# EAGLE board foo (EAGLE 4.11)
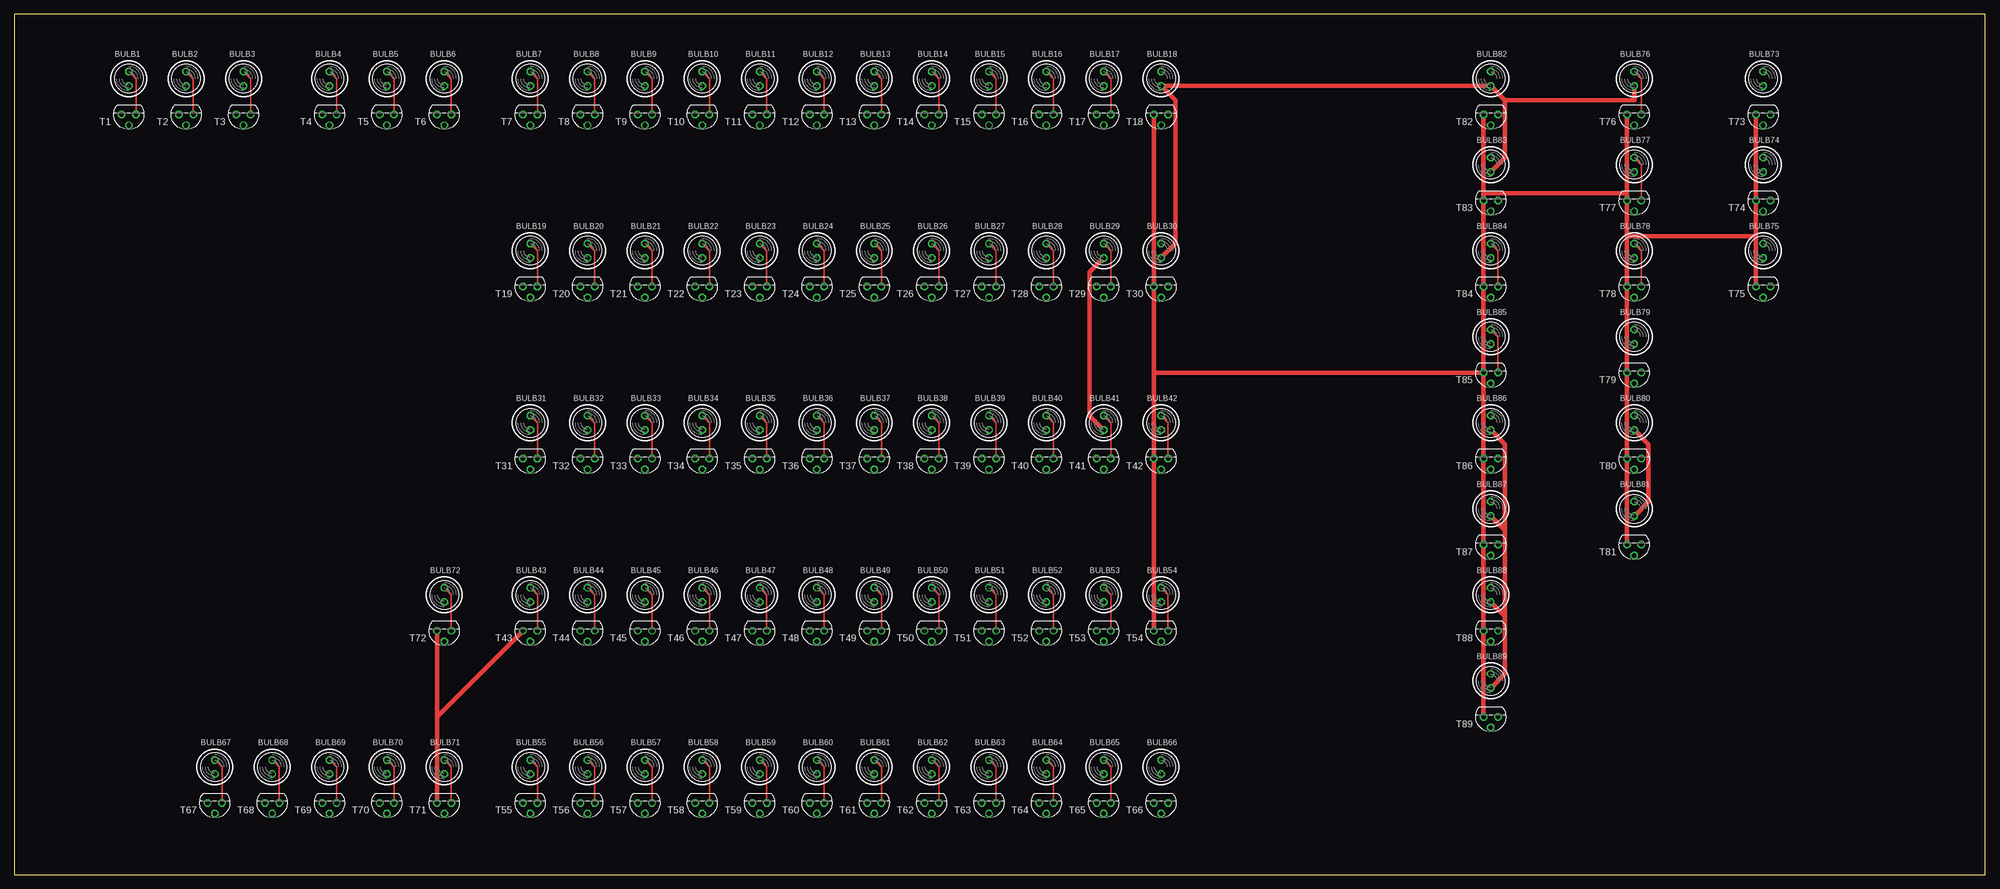
[diagram p0: board, top side]
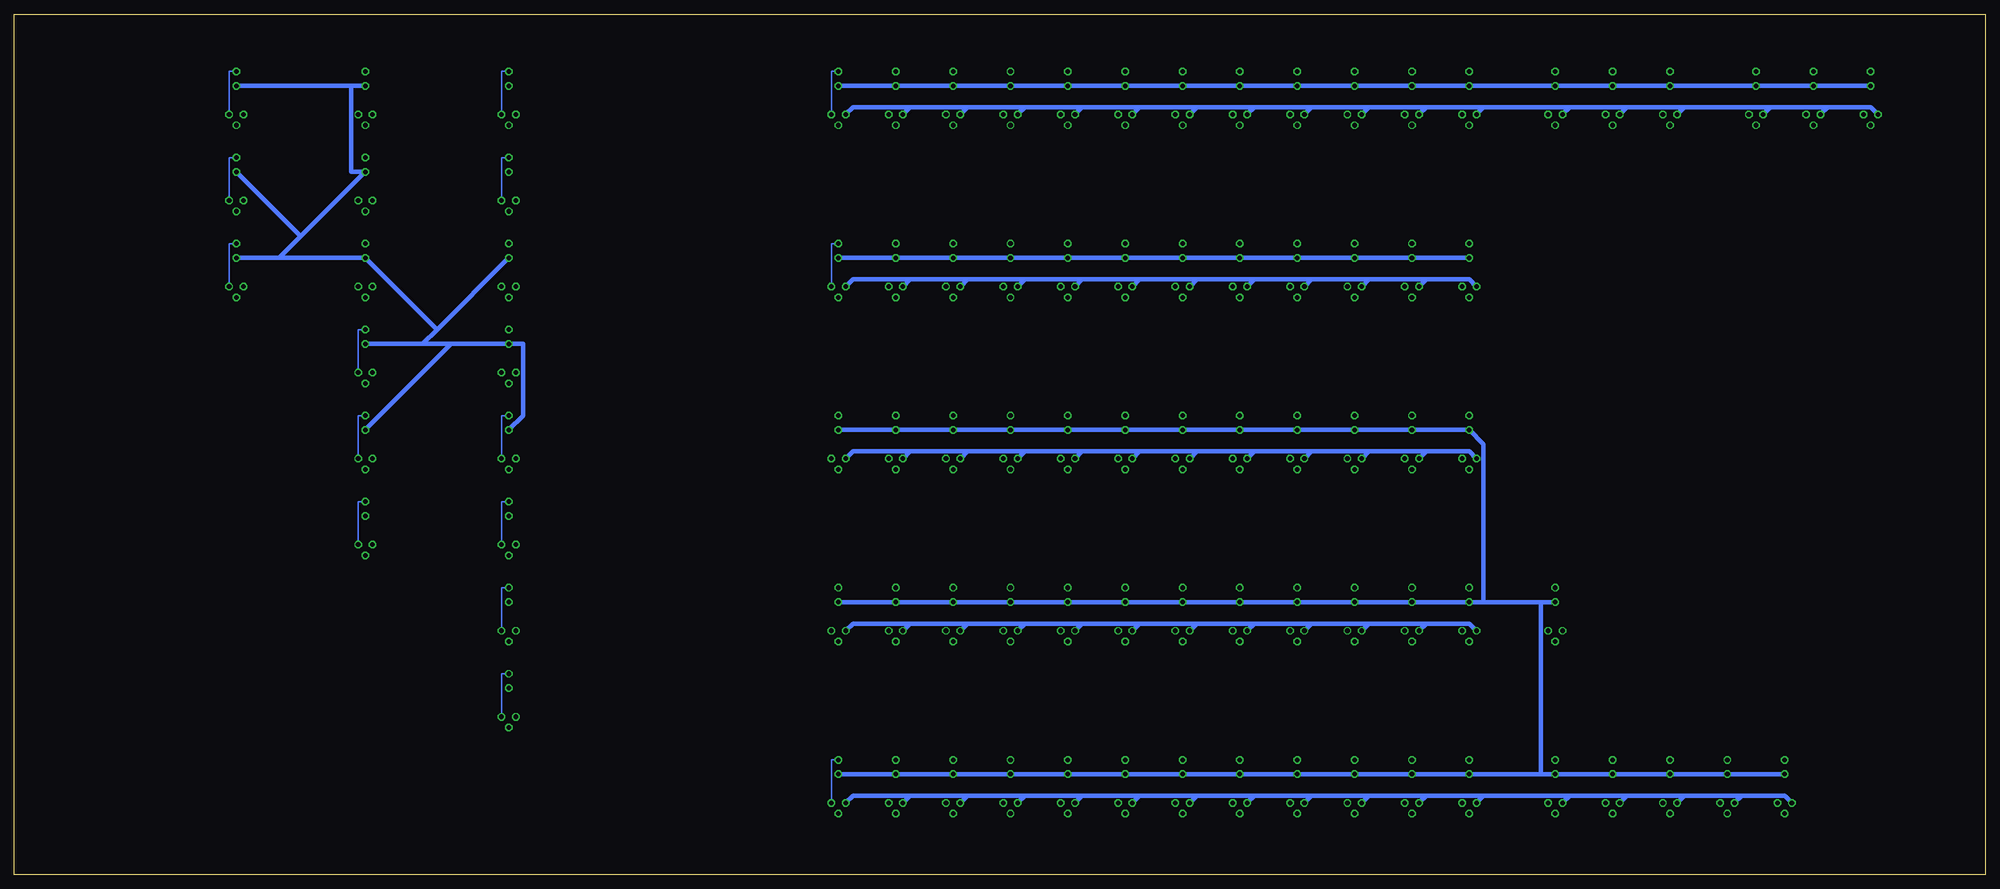
[diagram p1: board, bottom side, seen from below]

Size 349.25 x 152.4 mm. Coordinates in mm from the lower left corner, seen from the top.
Outline: 0,0 349.25,0 349.25,152.4 0,152.4 0,0
Copper layers (1*16): Top 0.035mm / dielectric 1.5mm / Bottom 0.035mm
Design rules "default": minimum track width 10mil, minimum drill 24mil, track to track 8mil, track to pad 8mil, pad to pad 8mil, via to via 8mil, smd to smd 8mil, copper to edge 40mil, drill to drill 8mil, minimum pad ring 10mil, minimum via ring 8mil, stop-mask expansion 4mil, vias tented up to drill 0mil, thermal gap 10mil
Net classes: 1 supply: width 0.762 mm

## Footprints (pad centres in the part's own frame; a part is rotated, then mirrored left to right if it is on the bottom)
BULB = drill 0.813 octagon: A 0,0; B 0,2.54
TO92 = drill 0.813 octagon: 1 1.27,0; 2 0,1.905; 3 -1.27,0

## Placement (x,y rotation side)
BULB1  [BULB]  20.32,139.7 0 top
BULB2  [BULB]  30.48,139.7 0 top
BULB3  [BULB]  40.64,139.7 0 top
BULB4  [BULB]  55.88,139.7 0 top
BULB5  [BULB]  66.04,139.7 0 top
BULB6  [BULB]  76.2,139.7 0 top
BULB7  [BULB]  91.44,139.7 0 top
BULB8  [BULB]  101.6,139.7 0 top
BULB9  [BULB]  111.76,139.7 0 top
BULB10  [BULB]  121.92,139.7 0 top
BULB11  [BULB]  132.08,139.7 0 top
BULB12  [BULB]  142.24,139.7 0 top
BULB13  [BULB]  152.4,139.7 0 top
BULB14  [BULB]  162.56,139.7 0 top
BULB15  [BULB]  172.72,139.7 0 top
BULB16  [BULB]  182.88,139.7 0 top
BULB17  [BULB]  193.04,139.7 0 top
BULB18  [BULB]  203.2,139.7 0 top
BULB19  [BULB]  91.44,109.22 0 top
BULB20  [BULB]  101.6,109.22 0 top
BULB21  [BULB]  111.76,109.22 0 top
BULB22  [BULB]  121.92,109.22 0 top
BULB23  [BULB]  132.08,109.22 0 top
BULB24  [BULB]  142.24,109.22 0 top
BULB25  [BULB]  152.4,109.22 0 top
BULB26  [BULB]  162.56,109.22 0 top
BULB27  [BULB]  172.72,109.22 0 top
BULB28  [BULB]  182.88,109.22 0 top
BULB29  [BULB]  193.04,109.22 0 top
BULB30  [BULB]  203.2,109.22 0 top
BULB31  [BULB]  91.44,78.74 0 top
BULB32  [BULB]  101.6,78.74 0 top
BULB33  [BULB]  111.76,78.74 0 top
BULB34  [BULB]  121.92,78.74 0 top
BULB35  [BULB]  132.08,78.74 0 top
BULB36  [BULB]  142.24,78.74 0 top
BULB37  [BULB]  152.4,78.74 0 top
BULB38  [BULB]  162.56,78.74 0 top
BULB39  [BULB]  172.72,78.74 0 top
BULB40  [BULB]  182.88,78.74 0 top
BULB41  [BULB]  193.04,78.74 0 top
BULB42  [BULB]  203.2,78.74 0 top
BULB43  [BULB]  91.44,48.26 0 top
BULB44  [BULB]  101.6,48.26 0 top
BULB45  [BULB]  111.76,48.26 0 top
BULB46  [BULB]  121.92,48.26 0 top
BULB47  [BULB]  132.08,48.26 0 top
BULB48  [BULB]  142.24,48.26 0 top
BULB49  [BULB]  152.4,48.26 0 top
BULB50  [BULB]  162.56,48.26 0 top
BULB51  [BULB]  172.72,48.26 0 top
BULB52  [BULB]  182.88,48.26 0 top
BULB53  [BULB]  193.04,48.26 0 top
BULB54  [BULB]  203.2,48.26 0 top
BULB55  [BULB]  91.44,17.78 0 top
BULB56  [BULB]  101.6,17.78 0 top
BULB57  [BULB]  111.76,17.78 0 top
BULB58  [BULB]  121.92,17.78 0 top
BULB59  [BULB]  132.08,17.78 0 top
BULB60  [BULB]  142.24,17.78 0 top
BULB61  [BULB]  152.4,17.78 0 top
BULB62  [BULB]  162.56,17.78 0 top
BULB63  [BULB]  172.72,17.78 0 top
BULB64  [BULB]  182.88,17.78 0 top
BULB65  [BULB]  193.04,17.78 0 top
BULB66  [BULB]  203.2,17.78 0 top
BULB67  [BULB]  35.56,17.78 0 top
BULB68  [BULB]  45.72,17.78 0 top
BULB69  [BULB]  55.88,17.78 0 top
BULB70  [BULB]  66.04,17.78 0 top
BULB71  [BULB]  76.2,17.78 0 top
BULB72  [BULB]  76.2,48.26 0 top
BULB73  [BULB]  309.88,139.7 0 top
BULB74  [BULB]  309.88,124.46 0 top
BULB75  [BULB]  309.88,109.22 0 top
BULB76  [BULB]  287.02,139.7 0 top
BULB77  [BULB]  287.02,124.46 0 top
BULB78  [BULB]  287.02,109.22 0 top
BULB79  [BULB]  287.02,93.98 0 top
BULB80  [BULB]  287.02,78.74 0 top
BULB81  [BULB]  287.02,63.5 0 top
BULB82  [BULB]  261.62,139.7 0 top
BULB83  [BULB]  261.62,124.46 0 top
BULB84  [BULB]  261.62,109.22 0 top
BULB85  [BULB]  261.62,93.98 0 top
BULB86  [BULB]  261.62,78.74 0 top
BULB87  [BULB]  261.62,63.5 0 top
BULB88  [BULB]  261.62,48.26 0 top
BULB89  [BULB]  261.62,33.02 0 top
T1  2N2222  [TO92]  20.32,134.62 180 top
T2  2N2222  [TO92]  30.48,134.62 180 top
T3  2N2222  [TO92]  40.64,134.62 180 top
T4  2N2222  [TO92]  55.88,134.62 180 top
T5  2N2222  [TO92]  66.04,134.62 180 top
T6  2N2222  [TO92]  76.2,134.62 180 top
T7  2N2222  [TO92]  91.44,134.62 180 top
T8  2N2222  [TO92]  101.6,134.62 180 top
T9  2N2222  [TO92]  111.76,134.62 180 top
T10  2N2222  [TO92]  121.92,134.62 180 top
T11  2N2222  [TO92]  132.08,134.62 180 top
T12  2N2222  [TO92]  142.24,134.62 180 top
T13  2N2222  [TO92]  152.4,134.62 180 top
T14  2N2222  [TO92]  162.56,134.62 180 top
T15  2N2222  [TO92]  172.72,134.62 180 top
T16  2N2222  [TO92]  182.88,134.62 180 top
T17  2N2222  [TO92]  193.04,134.62 180 top
T18  2N2222  [TO92]  203.2,134.62 180 top
T19  2N2222  [TO92]  91.44,104.14 180 top
T20  2N2222  [TO92]  101.6,104.14 180 top
T21  2N2222  [TO92]  111.76,104.14 180 top
T22  2N2222  [TO92]  121.92,104.14 180 top
T23  2N2222  [TO92]  132.08,104.14 180 top
T24  2N2222  [TO92]  142.24,104.14 180 top
T25  2N2222  [TO92]  152.4,104.14 180 top
T26  2N2222  [TO92]  162.56,104.14 180 top
T27  2N2222  [TO92]  172.72,104.14 180 top
T28  2N2222  [TO92]  182.88,104.14 180 top
T29  2N2222  [TO92]  193.04,104.14 180 top
T30  2N2222  [TO92]  203.2,104.14 180 top
T31  2N2222  [TO92]  91.44,73.66 180 top
T32  2N2222  [TO92]  101.6,73.66 180 top
T33  2N2222  [TO92]  111.76,73.66 180 top
T34  2N2222  [TO92]  121.92,73.66 180 top
T35  2N2222  [TO92]  132.08,73.66 180 top
T36  2N2222  [TO92]  142.24,73.66 180 top
T37  2N2222  [TO92]  152.4,73.66 180 top
T38  2N2222  [TO92]  162.56,73.66 180 top
T39  2N2222  [TO92]  172.72,73.66 180 top
T40  2N2222  [TO92]  182.88,73.66 180 top
T41  2N2222  [TO92]  193.04,73.66 180 top
T42  2N2222  [TO92]  203.2,73.66 180 top
T43  2N2222  [TO92]  91.44,43.18 180 top
T44  2N2222  [TO92]  101.6,43.18 180 top
T45  2N2222  [TO92]  111.76,43.18 180 top
T46  2N2222  [TO92]  121.92,43.18 180 top
T47  2N2222  [TO92]  132.08,43.18 180 top
T48  2N2222  [TO92]  142.24,43.18 180 top
T49  2N2222  [TO92]  152.4,43.18 180 top
T50  2N2222  [TO92]  162.56,43.18 180 top
T51  2N2222  [TO92]  172.72,43.18 180 top
T52  2N2222  [TO92]  182.88,43.18 180 top
T53  2N2222  [TO92]  193.04,43.18 180 top
T54  2N2222  [TO92]  203.2,43.18 180 top
T55  2N2222  [TO92]  91.44,12.7 180 top
T56  2N2222  [TO92]  101.6,12.7 180 top
T57  2N2222  [TO92]  111.76,12.7 180 top
T58  2N2222  [TO92]  121.92,12.7 180 top
T59  2N2222  [TO92]  132.08,12.7 180 top
T60  2N2222  [TO92]  142.24,12.7 180 top
T61  2N2222  [TO92]  152.4,12.7 180 top
T62  2N2222  [TO92]  162.56,12.7 180 top
T63  2N2222  [TO92]  172.72,12.7 180 top
T64  2N2222  [TO92]  182.88,12.7 180 top
T65  2N2222  [TO92]  193.04,12.7 180 top
T66  2N2222  [TO92]  203.2,12.7 180 top
T67  2N2222  [TO92]  35.56,12.7 180 top
T68  2N2222  [TO92]  45.72,12.7 180 top
T69  2N2222  [TO92]  55.88,12.7 180 top
T70  2N2222  [TO92]  66.04,12.7 180 top
T71  2N2222  [TO92]  76.2,12.7 180 top
T72  2N2222  [TO92]  76.2,43.18 180 top
T73  2N2222  [TO92]  309.88,134.62 180 top
T74  2N2222  [TO92]  309.88,119.38 180 top
T75  2N2222  [TO92]  309.88,104.14 180 top
T76  2N2222  [TO92]  287.02,134.62 180 top
T77  2N2222  [TO92]  287.02,119.38 180 top
T78  2N2222  [TO92]  287.02,104.14 180 top
T79  2N2222  [TO92]  287.02,88.9 180 top
T80  2N2222  [TO92]  287.02,73.66 180 top
T81  2N2222  [TO92]  287.02,58.42 180 top
T82  2N2222  [TO92]  261.62,134.62 180 top
T83  2N2222  [TO92]  261.62,119.38 180 top
T84  2N2222  [TO92]  261.62,104.14 180 top
T85  2N2222  [TO92]  261.62,88.9 180 top
T86  2N2222  [TO92]  261.62,73.66 180 top
T87  2N2222  [TO92]  261.62,58.42 180 top
T88  2N2222  [TO92]  261.62,43.18 180 top
T89  2N2222  [TO92]  261.62,27.94 180 top

## Library data of the parts
BULB1-BULB89 = dec-con
T1-T89 = transistor

## Nets
+15V [supply]: BULB1.A BULB2.A BULB3.A BULB4.A BULB5.A BULB6.A BULB7.A BULB8.A BULB9.A BULB10.A BULB11.A BULB12.A BULB13.A BULB14.A BULB15.A BULB16.A BULB17.A BULB18.A BULB19.A BULB20.A BULB21.A BULB22.A BULB23.A BULB24.A BULB25.A BULB26.A BULB27.A BULB28.A BULB29.A BULB30.A BULB31.A BULB32.A BULB33.A BULB34.A BULB35.A BULB36.A BULB37.A BULB38.A BULB39.A BULB40.A BULB41.A BULB42.A BULB43.A BULB44.A BULB45.A BULB46.A BULB47.A BULB48.A BULB49.A BULB50.A BULB51.A BULB52.A BULB53.A BULB54.A BULB55.A BULB56.A BULB57.A BULB58.A BULB59.A BULB60.A BULB61.A BULB62.A BULB63.A BULB64.A BULB65.A BULB66.A BULB67.A BULB68.A BULB69.A BULB70.A BULB71.A BULB72.A BULB73.A BULB74.A BULB75.A BULB76.A BULB77.A BULB78.A BULB79.A BULB80.A BULB81.A BULB82.A BULB83.A BULB84.A BULB85.A BULB86.A BULB87.A BULB88.A BULB89.A
GND [supply]: T1.1 T2.1 T3.1 T4.1 T5.1 T6.1 T7.1 T8.1 T9.1 T10.1 T11.1 T12.1 T13.1 T14.1 T15.1 T16.1 T17.1 T18.1 T19.1 T20.1 T21.1 T22.1 T23.1 T24.1 T25.1 T26.1 T27.1 T28.1 T29.1 T30.1 T31.1 T32.1 T33.1 T34.1 T35.1 T36.1 T37.1 T38.1 T39.1 T40.1 T41.1 T42.1 T43.1 T44.1 T45.1 T46.1 T47.1 T48.1 T49.1 T50.1 T51.1 T52.1 T53.1 T54.1 T55.1 T56.1 T57.1 T58.1 T59.1 T60.1 T61.1 T62.1 T63.1 T64.1 T65.1 T66.1 T67.1 T68.1 T69.1 T70.1 T71.1 T72.1 T73.1 T74.1 T75.1 T76.1 T77.1 T78.1 T79.1 T80.1 T81.1 T82.1 T83.1 T84.1 T85.1 T86.1 T87.1 T88.1 T89.1
N$1: BULB1.B T1.3
N$2: BULB2.B T2.3
N$3: BULB3.B T3.3
N$4: BULB4.B T4.3
N$5: BULB5.B T5.3
N$6: BULB6.B T6.3
N$7: BULB7.B T7.3
N$8: BULB8.B T8.3
N$9: BULB9.B T9.3
N$10: BULB10.B T10.3
N$11: BULB11.B T11.3
N$12: BULB12.B T12.3
N$13: BULB13.B T13.3
N$14: BULB14.B T14.3
N$15: BULB15.B T15.3
N$16: BULB16.B T16.3
N$17: BULB17.B T17.3
N$18: BULB18.B T18.3
N$19: BULB19.B T19.3
N$20: BULB20.B T20.3
N$21: BULB21.B T21.3
N$22: BULB22.B T22.3
N$23: BULB23.B T23.3
N$24: BULB24.B T24.3
N$25: BULB25.B T25.3
N$26: BULB26.B T26.3
N$27: BULB27.B T27.3
N$28: BULB28.B T28.3
N$29: BULB29.B T29.3
N$30: BULB30.B T30.3
N$31: BULB31.B T31.3
N$32: BULB32.B T32.3
N$33: BULB33.B T33.3
N$34: BULB34.B T34.3
N$35: BULB35.B T35.3
N$36: BULB36.B T36.3
N$37: BULB37.B T37.3
N$38: BULB38.B T38.3
N$39: BULB39.B T39.3
N$40: BULB40.B T40.3
N$41: BULB41.B T41.3
N$42: BULB42.B T42.3
N$43: BULB43.B T43.3
N$44: BULB44.B T44.3
N$45: BULB45.B T45.3
N$46: BULB46.B T46.3
N$47: BULB47.B T47.3
N$48: BULB48.B T48.3
N$49: BULB49.B T49.3
N$50: BULB50.B T50.3
N$51: BULB51.B T51.3
N$52: BULB52.B T52.3
N$53: BULB53.B T53.3
N$54: BULB54.B T54.3
N$55: BULB55.B T55.3
N$56: BULB56.B T56.3
N$57: BULB57.B T57.3
N$58: BULB58.B T58.3
N$59: BULB59.B T59.3
N$60: BULB60.B T60.3
N$61: BULB61.B T61.3
N$62: BULB62.B T62.3
N$63: BULB63.B T63.3
N$64: BULB64.B T64.3
N$65: BULB65.B T65.3
N$66: BULB66.B T66.3
N$67: BULB67.B T67.3
N$68: BULB68.B T68.3
N$69: BULB69.B T69.3
N$70: BULB70.B T70.3
N$71: BULB71.B T71.3
N$72: BULB72.B T72.3
N$73: BULB73.B T73.3
N$74: BULB74.B T74.3
N$75: BULB75.B T75.3
N$76: BULB76.B T76.3
N$77: BULB77.B T77.3
N$78: BULB78.B T78.3
N$79: BULB79.B T79.3
N$80: BULB80.B T80.3
N$81: BULB81.B T81.3
N$82: BULB82.B T82.3
N$83: BULB83.B T83.3
N$84: BULB84.B T84.3
N$85: BULB85.B T85.3
N$86: BULB86.B T86.3
N$87: BULB87.B T87.3
N$88: BULB88.B T88.3
N$89: BULB89.B T89.3

## Tracks (layer width: path | path; a pad name or v marks a point on that pad's centre or on a via)
+15V
  Top 0.762: BULB83.A 264.16,127 264.16,137.16 | 264.16,137.16 BULB82.A BULB18.A 205.74,137.16 205.74,111.76 BULB30.A | 264.16,137.16 287.02,137.16 BULB76.A | BULB89.A 264.16,35.56 264.16,45.72 | 264.16,45.72 BULB88.A | 264.16,60.96 BULB87.A | 264.16,60.96 264.16,45.72 | BULB86.A 264.16,76.2 264.16,60.96 | BULB81.A 289.56,66.04 289.56,76.2 BULB80.A | BULB41.A 190.5,81.28 190.5,106.68 BULB29.A
  Bottom 0.762: BULB42.A BULB41.A BULB40.A BULB39.A BULB38.A BULB37.A BULB36.A BULB35.A BULB34.A BULB33.A BULB32.A BULB31.A 88.9,76.2 88.9,48.26 | 88.9,48.26 BULB43.A BULB44.A BULB45.A BULB46.A BULB47.A BULB48.A BULB49.A BULB50.A BULB51.A BULB52.A BULB53.A BULB54.A | 88.9,48.26 78.74,48.26 | 78.74,48.26 BULB72.A | BULB67.A BULB68.A BULB69.A BULB70.A BULB71.A 78.74,17.78 | BULB66.A BULB65.A BULB64.A BULB63.A BULB62.A BULB61.A BULB60.A BULB59.A BULB58.A BULB57.A BULB56.A BULB55.A 78.74,17.78 | 78.74,48.26 78.74,17.78 | 289.56,139.7 BULB73.A | BULB76.A 289.56,139.7 | 276.86,93.98 BULB79.A | 276.86,93.98 271.78,93.98 | 271.78,93.98 BULB85.A 259.08,93.98 259.08,81.28 BULB86.A | 274.32,96.52 276.86,93.98 | 274.32,96.52 BULB84.A | 274.32,96.52 BULB78.A 302.26,109.22 | 302.26,109.22 BULB75.A | 298.45,113.03 302.26,109.22 | 298.45,113.03 BULB77.A 289.56,124.46 289.56,139.7 | 298.45,113.03 BULB74.A | 271.78,93.98 BULB80.A | BULB19.A BULB20.A BULB21.A BULB22.A BULB23.A BULB24.A BULB25.A BULB26.A BULB27.A BULB28.A BULB29.A BULB30.A | BULB1.A BULB2.A BULB3.A BULB4.A BULB5.A BULB6.A BULB7.A BULB8.A BULB9.A BULB10.A BULB11.A BULB12.A BULB13.A BULB14.A BULB15.A BULB16.A BULB17.A BULB18.A
GND
  Top 0.762: 308.61,113.03 T74.1 T73.1 | 308.61,113.03 T75.1 | 285.75,120.65 T76.1 | 285.75,120.65 T77.1 285.75,113.03 | T81.1 T80.1 T79.1 T78.1 285.75,113.03 | 285.75,113.03 308.61,113.03 | 260.35,120.65 T82.1 | 260.35,120.65 T83.1 T84.1 T85.1 | T89.1 T88.1 T87.1 T86.1 T85.1 | 260.35,120.65 285.75,120.65 | 201.93,88.9 T30.1 T18.1 | 201.93,88.9 T42.1 T54.1 | 74.93,27.94 T71.1 | 74.93,27.94 T72.1 | T43.1 74.93,27.94 | 201.93,88.9 T85.1
  Bottom 0.762: T1.1 20.32,135.89 27.94,135.89 | 27.94,135.89 T2.1 | 38.1,135.89 T3.1 | 38.1,135.89 27.94,135.89 | 53.34,135.89 T4.1 | 53.34,135.89 38.1,135.89 | 63.5,135.89 T5.1 | 63.5,135.89 53.34,135.89 | 73.66,135.89 T6.1 | 73.66,135.89 63.5,135.89 | 88.9,135.89 T7.1 | 88.9,135.89 73.66,135.89 | 99.06,135.89 T8.1 | 99.06,135.89 88.9,135.89 | 109.22,135.89 T9.1 | 109.22,135.89 99.06,135.89 | 119.38,135.89 T10.1 | 119.38,135.89 109.22,135.89 | 129.54,135.89 T11.1 | 129.54,135.89 119.38,135.89 | 139.7,135.89 T12.1 | 139.7,135.89 129.54,135.89 | 149.86,135.89 T13.1 | 149.86,135.89 139.7,135.89 | 160.02,135.89 T14.1 | 160.02,135.89 149.86,135.89 | 170.18,135.89 T15.1 | 170.18,135.89 160.02,135.89 | 180.34,135.89 T16.1 | 180.34,135.89 170.18,135.89 | 190.5,135.89 T17.1 | 190.5,135.89 180.34,135.89 | T18.1 200.66,135.89 190.5,135.89 | T31.1 91.44,74.93 99.06,74.93 | 99.06,74.93 T32.1 | 109.22,74.93 T33.1 | 109.22,74.93 99.06,74.93 | 119.38,74.93 T34.1 | 119.38,74.93 109.22,74.93 | 129.54,74.93 T35.1 | 129.54,74.93 119.38,74.93 | 139.7,74.93 T36.1 | 139.7,74.93 129.54,74.93 | 149.86,74.93 T37.1 | 149.86,74.93 139.7,74.93 | 160.02,74.93 T38.1 | 160.02,74.93 149.86,74.93 | 170.18,74.93 T39.1 | 170.18,74.93 160.02,74.93 | T40.1 180.34,74.93 | 180.34,74.93 170.18,74.93 | 190.5,74.93 T41.1 | 180.34,74.93 190.5,74.93 | T42.1 200.66,74.93 190.5,74.93 | T19.1 91.44,105.41 99.06,105.41 | 99.06,105.41 T20.1 | 109.22,105.41 T21.1 | 109.22,105.41 99.06,105.41 | 119.38,105.41 T22.1 | 119.38,105.41 109.22,105.41 | 129.54,105.41 T23.1 | 129.54,105.41 119.38,105.41 | 139.7,105.41 T24.1 | 139.7,105.41 129.54,105.41 | 149.86,105.41 T25.1 | 149.86,105.41 139.7,105.41 | 160.02,105.41 T26.1 | 160.02,105.41 149.86,105.41
  Bottom 0.762: 170.18,105.41 T27.1 | 170.18,105.41 160.02,105.41 | 180.34,105.41 T28.1 | 180.34,105.41 170.18,105.41 | 190.5,105.41 T29.1 | 190.5,105.41 180.34,105.41 | T30.1 200.66,105.41 190.5,105.41 | T67.1 35.56,13.97 43.18,13.97 | 43.18,13.97 T68.1 | 53.34,13.97 T69.1 | 53.34,13.97 43.18,13.97 | 63.5,13.97 T70.1 | 63.5,13.97 53.34,13.97 | T71.1 73.66,13.97 | 73.66,13.97 63.5,13.97 | 88.9,13.97 T55.1 | 73.66,13.97 88.9,13.97 | 99.06,13.97 T56.1 | 88.9,13.97 99.06,13.97 | 99.06,44.45 T44.1 | 99.06,44.45 91.44,44.45 T43.1 | 109.22,13.97 T57.1 | 99.06,13.97 109.22,13.97 | 109.22,44.45 T45.1 | 109.22,44.45 99.06,44.45 | 119.38,13.97 T58.1 | 109.22,13.97 119.38,13.97 | 119.38,44.45 T46.1 | 119.38,44.45 109.22,44.45 | 129.54,13.97 T59.1 | 119.38,13.97 129.54,13.97 | 129.54,44.45 T47.1 | 129.54,44.45 119.38,44.45 | 139.7,13.97 T60.1 | 129.54,13.97 139.7,13.97 | 139.7,44.45 T48.1 | 139.7,44.45 129.54,44.45 | 149.86,13.97 T61.1 | 139.7,13.97 149.86,13.97 | 149.86,44.45 T49.1 | 149.86,44.45 139.7,44.45 | 160.02,13.97 T62.1 | 149.86,13.97 160.02,13.97 | 160.02,44.45 T50.1 | 160.02,44.45 149.86,44.45 | 170.18,13.97 T63.1 | 160.02,13.97 170.18,13.97 | 170.18,44.45 T51.1 | 170.18,44.45 160.02,44.45 | 180.34,13.97 T64.1 | 170.18,13.97 180.34,13.97 | 180.34,44.45 T52.1 | 180.34,44.45 170.18,44.45 | 190.5,13.97 T65.1 | 180.34,13.97 190.5,13.97 | 190.5,44.45 T53.1 | 190.5,44.45 180.34,44.45 | T66.1 200.66,13.97 190.5,13.97 | T54.1 200.66,44.45 190.5,44.45
N$1
  Top 0.254: T1.3 21.59,140.97 BULB1.B
N$2
  Top 0.254: T2.3 31.75,140.97 BULB2.B
N$3
  Top 0.254: T3.3 41.91,140.97 BULB3.B
N$4
  Top 0.254: T4.3 57.15,140.97 BULB4.B
N$5
  Top 0.254: T5.3 67.31,140.97 BULB5.B
N$6
  Top 0.254: T6.3 77.47,140.97 BULB6.B
N$7
  Top 0.254: T7.3 92.71,140.97 BULB7.B
N$8
  Top 0.254: T8.3 102.87,140.97 BULB8.B
N$9
  Top 0.254: BULB9.B 113.03,140.97 T9.3
N$10
  Top 0.254: T10.3 123.19,140.97 BULB10.B
N$11
  Top 0.254: T11.3 133.35,140.97 BULB11.B
N$12
  Top 0.254: T12.3 143.51,140.97 BULB12.B
N$13
  Top 0.254: T13.3 153.67,140.97 BULB13.B
N$14
  Top 0.254: T14.3 163.83,140.97 BULB14.B
N$15
  Top 0.254: T15.3 173.99,140.97 BULB15.B
N$16
  Top 0.254: T16.3 184.15,140.97 BULB16.B
N$17
  Top 0.254: T17.3 194.31,140.97 BULB17.B
N$18
  Bottom 0.254: T18.3 204.47,142.24 BULB18.B
N$19
  Top 0.254: T19.3 92.71,110.49 BULB19.B
N$20
  Top 0.254: T20.3 102.87,110.49 BULB20.B
N$21
  Top 0.254: T21.3 113.03,110.49 BULB21.B
N$22
  Top 0.254: T22.3 123.19,110.49 BULB22.B
N$23
  Top 0.254: T23.3 133.35,110.49 BULB23.B
N$24
  Top 0.254: BULB24.B 143.51,110.49 T24.3
N$25
  Top 0.254: T25.3 153.67,110.49 BULB25.B
N$26
  Top 0.254: T26.3 163.83,110.49 BULB26.B
N$27
  Top 0.254: T27.3 173.99,110.49 BULB27.B
N$28
  Top 0.254: T28.3 184.15,110.49 BULB28.B
N$29
  Top 0.254: T29.3 194.31,110.49 BULB29.B
N$30
  Bottom 0.254: T30.3 204.47,111.76 BULB30.B
N$31
  Top 0.254: T31.3 92.71,80.01 BULB31.B
N$32
  Top 0.254: T32.3 102.87,80.01 BULB32.B
N$33
  Top 0.254: T33.3 113.03,80.01 BULB33.B
N$34
  Top 0.254: T34.3 123.19,80.01 BULB34.B
N$35
  Top 0.254: T35.3 133.35,80.01 BULB35.B
N$36
  Top 0.254: T36.3 143.51,80.01 BULB36.B
N$37
  Top 0.254: T37.3 153.67,80.01 BULB37.B
N$38
  Top 0.254: T38.3 163.83,80.01 BULB38.B
N$39
  Top 0.254: BULB39.B 173.99,80.01 T39.3
N$40
  Top 0.254: T40.3 184.15,80.01 BULB40.B
N$41
  Top 0.254: T41.3 194.31,80.01 BULB41.B
N$42
  Top 0.254: T42.3 204.47,80.01 BULB42.B
N$43
  Top 0.254: T43.3 92.71,49.53 BULB43.B
N$44
  Top 0.254: T44.3 102.87,49.53 BULB44.B
N$45
  Top 0.254: T45.3 113.03,49.53 BULB45.B
N$46
  Top 0.254: T46.3 123.19,49.53 BULB46.B
N$47
  Top 0.254: T47.3 133.35,49.53 BULB47.B
N$48
  Top 0.254: T48.3 143.51,49.53 BULB48.B
N$49
  Top 0.254: T49.3 153.67,49.53 BULB49.B
N$50
  Top 0.254: T50.3 163.83,49.53 BULB50.B
N$51
  Top 0.254: T51.3 173.99,49.53 BULB51.B
N$52
  Top 0.254: T52.3 184.15,49.53 BULB52.B
N$53
  Top 0.254: T53.3 194.31,49.53 BULB53.B
N$54
  Top 0.254: BULB54.B 204.47,49.53 T54.3
N$55
  Top 0.254: T55.3 92.71,19.05 BULB55.B
N$56
  Top 0.254: T56.3 102.87,19.05 BULB56.B
N$57
  Top 0.254: T57.3 113.03,19.05 BULB57.B
N$58
  Top 0.254: T58.3 123.19,19.05 BULB58.B
N$59
  Top 0.254: T59.3 133.35,19.05 BULB59.B
N$60
  Top 0.254: T60.3 143.51,19.05 BULB60.B
N$61
  Top 0.254: T61.3 153.67,19.05 BULB61.B
N$62
  Top 0.254: T62.3 163.83,19.05 BULB62.B
N$63
  Top 0.254: T63.3 173.99,19.05 BULB63.B
N$64
  Top 0.254: T64.3 184.15,19.05 BULB64.B
N$65
  Top 0.254: T65.3 194.31,19.05 BULB65.B
N$66
  Bottom 0.254: T66.3 204.47,20.32 BULB66.B
N$67
  Top 0.254: T67.3 36.83,19.05 BULB67.B
N$68
  Top 0.254: T68.3 46.99,19.05 BULB68.B
N$69
  Top 0.254: T69.3 57.15,19.05 BULB69.B
N$70
  Top 0.254: T70.3 67.31,19.05 BULB70.B
N$71
  Top 0.254: T71.3 77.47,19.05 BULB71.B
N$72
  Top 0.254: T72.3 77.47,49.53 BULB72.B
N$73
  Bottom 0.254: T73.3 311.15,142.24 BULB73.B
N$74
  Bottom 0.254: T74.3 311.15,127 BULB74.B
N$75
  Bottom 0.254: T75.3 311.15,111.76 BULB75.B
N$76
  Top 0.254: T76.3 288.29,140.97 BULB76.B
N$77
  Top 0.254: T77.3 288.29,125.73 BULB77.B
N$78
  Top 0.254: T78.3 288.29,110.49 BULB78.B
N$79
  Bottom 0.254: T79.3 288.29,96.52 BULB79.B
N$80
  Bottom 0.254: T80.3 288.29,81.28 BULB80.B
N$81
  Bottom 0.254: T81.3 288.29,66.04 BULB81.B
N$82
  Bottom 0.254: T82.3 262.89,142.24 BULB82.B
N$83
  Bottom 0.254: T83.3 262.89,127 BULB83.B
N$84
  Top 0.254: T84.3 262.89,110.49 BULB84.B
N$85
  Top 0.254: T85.3 262.89,95.25 BULB85.B
N$86
  Bottom 0.254: T86.3 262.89,81.28 BULB86.B
N$87
  Bottom 0.254: T87.3 262.89,66.04 BULB87.B
N$88
  Bottom 0.254: T88.3 262.89,50.8 BULB88.B
N$89
  Bottom 0.254: T89.3 262.89,35.56 BULB89.B

## Text on the board
Dimension: TODO: Fix the spacing to match the original. | TODO: Rename the bulbs appropriately.